# Altium PCB Elekid_MCU.PcbDoc
Units mm, origin at the board's own origin, x right, y up, seen from the top; angles counter-clockwise.
Board outline 56.92 x 36.36 mm, 2 copper layers (Top Layer, Bottom Layer); 29 components, 28 nets, 123 pads, 27 vias.
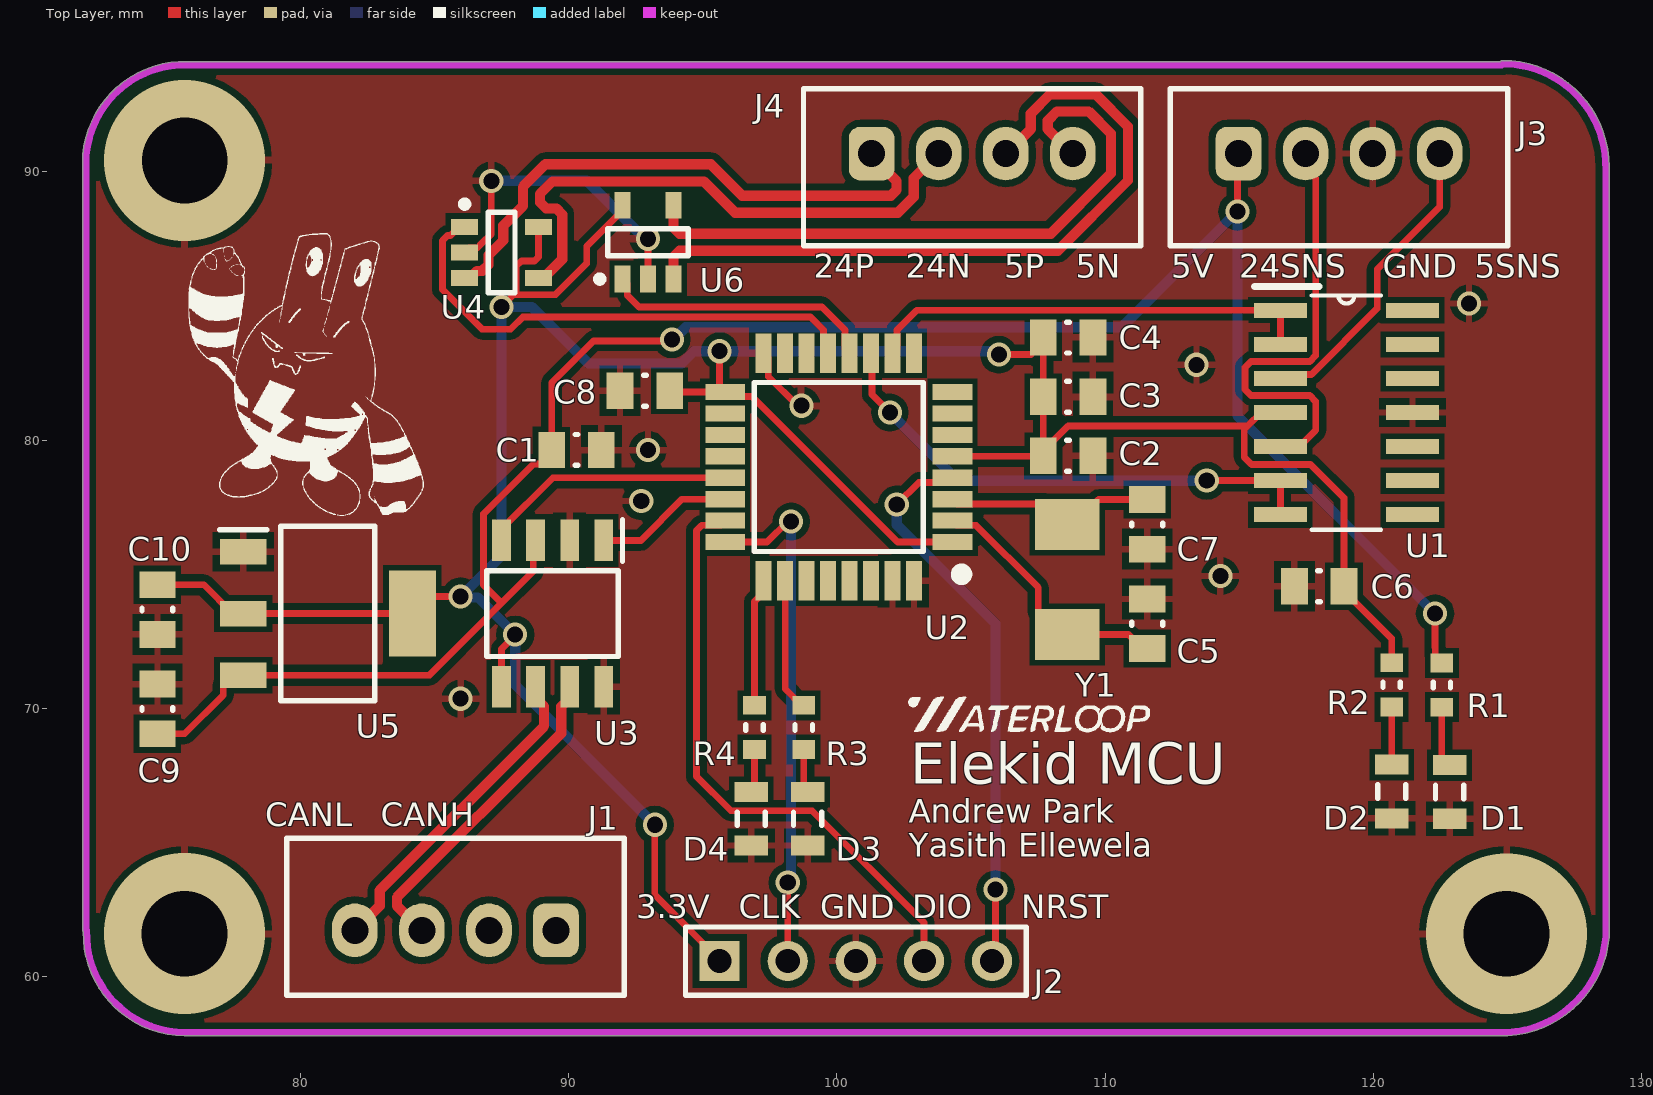
[diagram p0: Top Layer view]
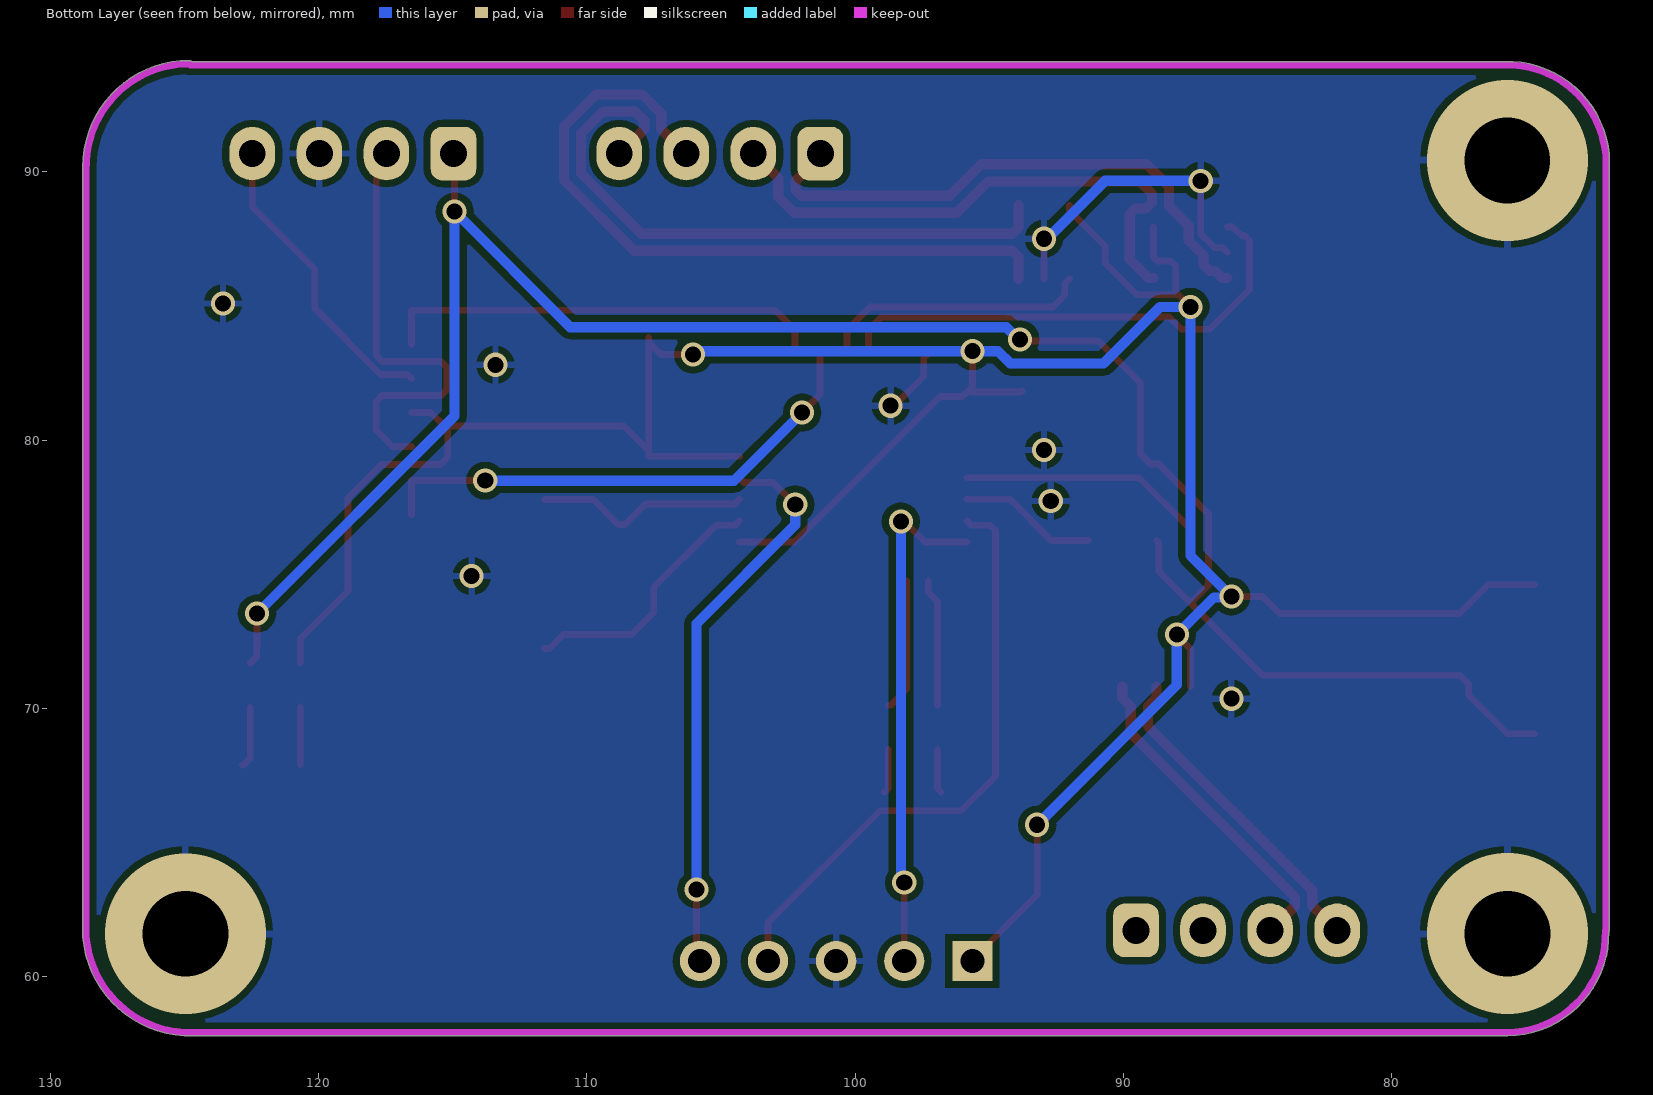
[diagram p1: Bottom Layer view, seen from below]
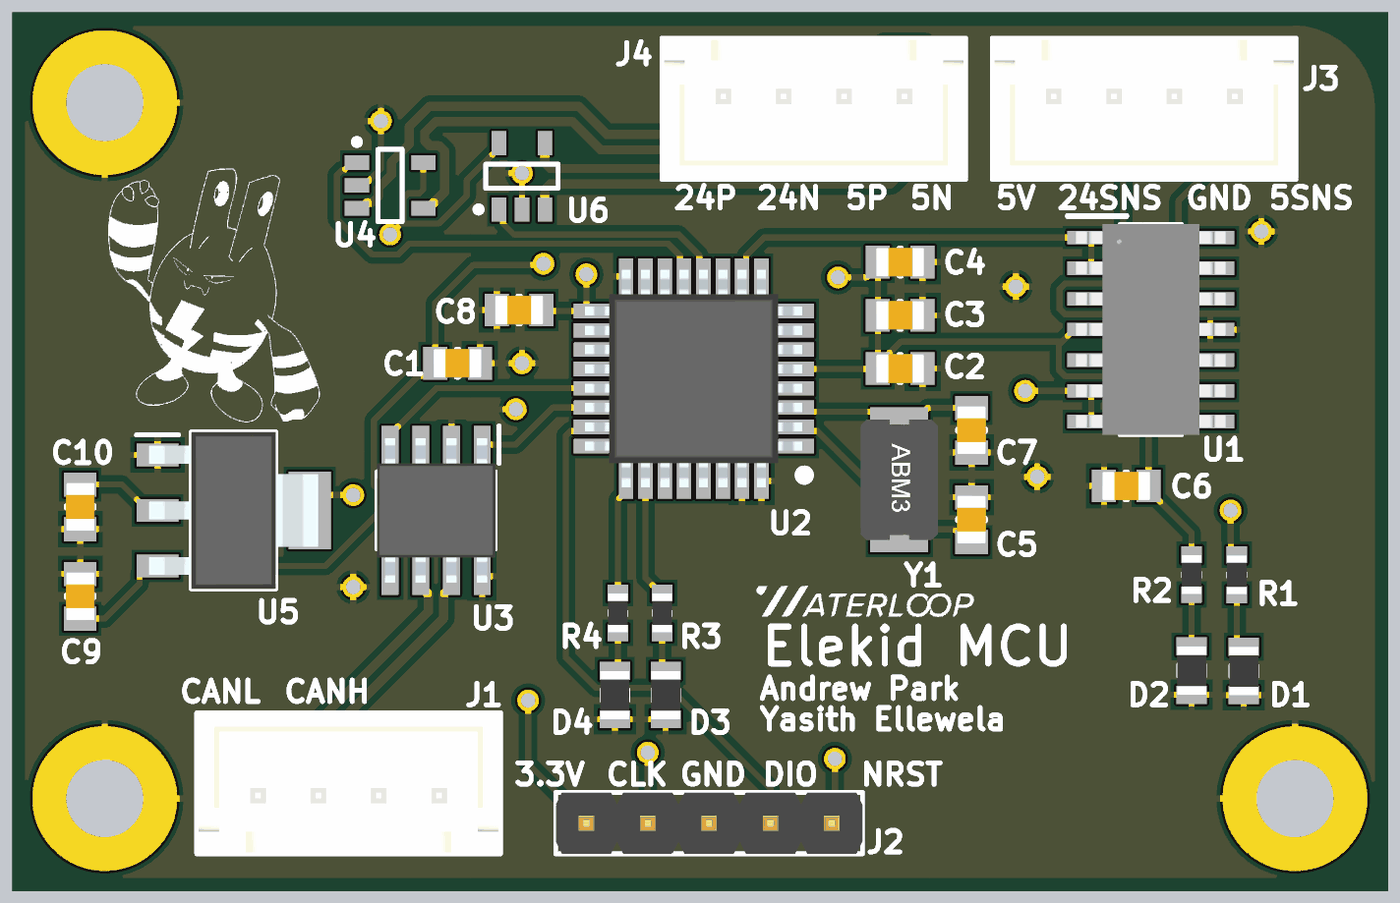
[diagram p2: 3D render of the assembled board from above, using the file's embedded part models]

## Layer stack, top to bottom
Top Solder: solder mask 0.0102, Solder Resist, Dk 3.5
Top Layer: signal copper 0.0356
Dielectric 1: dielectric 0.32, FR-4, Dk 4.8
Bottom Layer: signal copper 0.0356
Bottom Solder: solder mask 0.0102, Solder Resist, Dk 3.5

## Board outline
71.914,61.676 ccw(c75.72,61.6) 75.674,57.793 ccw(c75.72,57.912) 75.72,57.785 124.654,57.785 ccw(c124.654,57.912) 124.674,57.786 ccw(c124.788,61.801) 128.804,61.801 ccw(c128.677,61.801) 128.792,61.855 128.792,90.185 ccw(c124.83,90.185) 124.83,94.147 ccw(c124.83,94.019) 124.738,94.107 75.82,94.107 ccw(c75.691,90.303) 71.884,90.303 71.884,61.758 ccw(c72.011,61.758)

## Design rules (kind name [scope] priority, off if disabled: settings)
Clearance [All] p1: gap=0.254 ignorepadtopadclearanceinfootprint=FALSE except(0: Arc-Hole Track-Hole SMDPad-Hole THPad-Hole Via-Hole Fill-Hole Poly-Hole Region-Hole Text-Hole; 0.127: Arc-Arc Arc-Track Track-Track SMDPad-SMDPad; 0.2: Arc-SMDPad Track-SMDPad SMDPad-Fill SMDPad-Poly SMDPad-Region)
DiffPairsRouting [All] p1: maxlimit=0.254 minlimit=0.254 mostfreqgap=0.254 toplayer_minwidth=0.381 toplayer_maxwidth=0.381 toplayer_prefwidth=0.381 bottomlayer_minwidth=0.381 bottomlayer_maxwidth=0.381 bottomlayer_prefwidth=0.381 maxuncoupledlength=12.7
PolygonConnect [All] p1: connectstyle=Relief reliefconductorwidth=0.254 reliefentries=4 polygonreliefangle="90 Angle" airgapwidth=0.254
RoutingVias [All] p1: holewidth=0.5 width=1 viastyle="Through Hole" minholewidth=0.2 minwidth=0.6 maxholewidth=0.711 maxwidth=1.27
SilkToSolderMaskClearance [IsPad] p1: minsilkscreentomaskgap=0.15 clearancetoexposedcopper=TRUE
SolderMaskExpansion [All] p1: expansion=0.102 istentingtop=FALSE
Width [All] p1: maxlimit=0.381 minlimit=0.254 preferedwidth=0.381 toplayer_prefwidth=0.254 minimp=50.000000 maximp=50.000000 favimp=50.000000
28 further rules are at their usual default settings.

## Classes and differential pairs
differential pair CAN: +CAN_P -CAN_N
differential pair 24V: +24V_P -24V_N
differential pair 5V: +5V_P -5V_N

## Components (designator, comment, footprint, x,y, rotation, side; value= is the part's Value field where it differs from the comment)
C1 "Capacitor - Nonpolarized" "0805 - Capacitor" 92.847,81.833 r0 top value=100nF
C2 "Capacitor - Nonpolarized" "0805 - Capacitor" 108.621,79.411 r180 top value=100nF
C3 "Capacitor - Nonpolarized" "0805 - Capacitor" 108.621,81.616 r180 top value=10nF
C4 "Capacitor - Nonpolarized" "0805 - Capacitor" 108.621,83.82 r180 top value=1uF
C5 "Capacitor - Nonpolarized" "0805 - Capacitor" 111.575,73.152 r270 top value=28pF
C6 "Capacitor - Nonpolarized" "0805 - Capacitor" 117.983,74.549 r0 top value=100nF
C7 "Capacitor - Nonpolarized" "0805 - Capacitor" 111.575,76.856 r90 top value=28pF
C8 "Capacitor - Nonpolarized" "0805 - Capacitor" 90.297,79.629 r180 top value=100nF
C9 "Capacitor - Nonpolarized" "0805 - Capacitor" 74.676,69.977 r270 top value=10uF
C10 "Capacitor - Nonpolarized" "0805 - Capacitor" 74.676,73.681 r90 top value=10uF
D1 "LED" "0805 - Resistor" 122.845,66.882 r270 top
D2 "LED" "0805 - Resistor" 120.686,66.898 r270 top
D3 "LED" "0805 - Resistor" 98.914,65.882 r270 top
D4 "LED" "0805 - Resistor" 96.81,65.882 r270 top
J1 "1x4 Header" B4B-XH 89.535,61.722 r180 top
J2 "1x5 Header" HDR1X5 95.631,60.579 r0 top
J3 "1x4 Header" B4B-XH 114.975,90.678 r0 top
J4 "1x4 Header" B4B-XH 101.299,90.678 r0 top
R1 "Resistor" "0603 - Resistor" 122.555,70.866 r270 top value=330
R2 "Resistor" "0603 - Resistor" 120.686,70.873 r270 top value=330
R3 "Resistor" "0603 - Resistor" 98.768,69.286 r270 top value=330
R4 "Resistor" "0603 - Resistor" 96.937,69.286 r270 top value=330
U1 "LM324AMX/NOPB" LM324AMX/NOPB 118.999,81.026 r0 top
U2 "STM32F303K6T6" QFP80P900X900X160-32N 100.076,78.994 r180 top
U3 "TJA1051T_3,118" TJA1051T/3,118 89.408,73.533 r270 top
U4 "INA180" INA180 87.503,86.995 r0 top
U5 "TLV1117-33IDCYR" TLV1117 81.026,73.533 r0 top
U6 "INA180" INA180 92.964,87.376 r90 top
Y1 "Oscillator" "2-SMD NO LEAD CRSYSTAL" 108.585,74.803 r270 top

## Footprints (in the part's own frame and the unit in brackets; to place one, negate y for a bottom-side part, rotate by r counter-clockwise, add the part's x,y. Pads: shape width x height; smd on the part's side, far side on the other; paste and mask are expansions set on the pad)
"2-SMD NO LEAD CRSYSTAL" [mm]
  rect 1.9x2.4 smd: 1(-2.05,0) 2(2.05,0)
  body extent -2.5,-1.6 2.5,1.6, height 1.3
"0603 - Resistor" [mm] "0603 Chip Resistor - IPC Medium Density"
  rect 0.7x0.85 smd: 1(-0.825,0) 2(0.825,0)
  silkscreen extent -0.1,-0.33 0.1,0.33, body extent -0.8,-0.4 0.8,0.4, height 0.45
"0805 - Capacitor" [mm] "0805 Chip Capacitor - IPC Medium Density"
  rect 1x1.35 smd: 1(-0.925,0) 2(0.925,0)
  silkscreen extent -0.05,-0.58 0.05,0.58, body extent -1,-0.6 1,0.6, height 1.2
"0805 - Resistor" [mm] "0805 Chip Resistor - IPC Medium Density"
  rect 0.75x1.25 smd: 1(-1,0) 2(1,0)
  silkscreen extent -0.25,-0.53 0.25,0.53, body extent -1,-0.6 1,0.6, height 0.5
B4B-XH [mm] "JST 4-Pin"
  rrect50% 1.7x2 hole 1: 1(0,0)
  oval 1.7x2 hole 1: 2(2.5,0) 3(5,0) 4(7.5,0)
  silkscreen extent -2.54,-3.43 10.03,2.41, body extent -2.45,-3.4 9.95,2.35, height 7
HDR1X5 [mm] "Connector; Header; 5 Position"
  rect 1.5x1.5 hole 0.9: 1(0,0)
  round 1.5 hole 0.9: 2(2.54,0) 3(5.08,0) 4(7.62,0) 5(10.16,0)
  silkscreen extent -1.27,-1.27 11.43,1.27, body extent -1.27,-1.27 11.43,1.27, height 8.54
INA180 [mm] "SOT23, 5-Leads, Body 2.80x2.80mm, Pitch 0.95mm, IPC Medium Density"
  rect 1x0.6 smd: 1(-1.375,0.95) 2(-1.375,0) 3(-1.375,-0.95) 4(1.375,-0.95) 5(1.375,0.95)
  silkscreen extent -1.5,-1.5 0.5,1.92, body extent -0.88,-1.5 0.87,1.5, height 1.1
LM324AMX/NOPB [mil] "Gen Purp 4Ch Opamp"
  rect 78x22 smd: 1(-97,150) 2(-97,100) 3(-97,50) 4(-97,0) 5(-97,-50) 6(-97,-100) 7(-97,-150) 8(97,-150) 9(97,-100) 10(97,-50) 11(97,0) 12(97,50) 13(97,100) 14(97,150)
  silkscreen extent -135,-172 51,185, body extent -122,-172 122,172, height 69
QFP80P900X900X160-32N [mm]
  rect 1.475x0.6 smd: 1(-4.238,2.8) 2(-4.238,2) 3(-4.238,1.2) 4(-4.238,0.4) 5(-4.238,-0.4) 6(-4.238,-1.2) 7(-4.238,-2) 8(-4.238,-2.8) 17(4.238,-2.8) 18(4.238,-2) 19(4.238,-1.2) 20(4.238,-0.4) 21(4.238,0.4) 22(4.238,1.2) 23(4.238,2) 24(4.238,2.8)
  rect 0.6x1.475 smd: 9(-2.8,-4.238) 10(-2,-4.238) 11(-1.2,-4.238) 12(-0.4,-4.238) 13(0.4,-4.238) 14(1.2,-4.238) 15(2,-4.238) 16(2.8,-4.238) 25(2.8,4.238) 26(2,4.238) 27(1.2,4.238) 28(0.4,4.238) 29(-0.4,4.238) 30(-1.2,4.238) 31(-2,4.238) 32(-2.8,4.238)
  silkscreen extent -4.77,-3.15 3.15,4.2, body extent -4.5,-4.5 4.5,4.5, height 1.6
TJA1051T/3,118 [mm] "SOIC127P600X175-8N"
  rect 1.55x0.7 smd: 1(-2.725,1.905) 2(-2.725,0.635) 3(-2.725,-0.635) 4(-2.725,-1.905) 5(2.725,-1.905) 6(2.725,-0.635) 7(2.725,0.635) 8(2.725,1.905)
  silkscreen extent -3.5,-2.45 1.6,2.61, body extent -3,-2.45 3,2.45, height 1.75
TLV1117 [mm] "SOT230P700X180-4N"
  rect 1.75x0.95 smd: 1(-3.15,2.3) 2(-3.15,0) 3(-3.15,-2.3)
  rect 1.75x3.2 smd: 2(3.15,0)
  silkscreen extent -4.03,-3.25 1.75,3.25, body extent -3.5,-3.25 3.5,3.25, height 1.8

## Part data
C1 C2 C6 C8: "Nonpolarized Capacitor", Supplier Part Number=311-1140-1-ND
C3: "Nonpolarized Capacitor", Supplier Part Number=311-1136-1-ND
C4: "Nonpolarized Capacitor", Supplier Part Number=311-1886-1-ND
C5 C7: "Nonpolarized Capacitor", Supplier Part Number=1276-2622-1-ND
C9 C10: "Nonpolarized Capacitor", Supplier Part Number=490-14381-1-ND
D1 D2: "Light Emitting Diode", Supplier Part Number=732-4986-1-ND
D3: "Light Emitting Diode", Supplier Part Number=732-4987-1-ND
D4: "Light Emitting Diode", Supplier Part Number=732-4984-1-ND
J1 J3 J4: "1x4 Pin Header"
J2: "1x5 Pin Header"
R1 R2 R3 R4: Supplier Part Number=311-330HRCT-ND
U1: "Gen Purp 4Ch Opamp"
U2: "Integrated Circuit"
U3: "CAN Transceiver IC 4.5V-5.5V 250ns", Manufacturer=NXP, Manufacturer Part Number=TJA1051T/3,118, Supplier Part Number=568-8684-1-ND, Datasheet=http://www.nxp.com/docs/en/data-sheet/TJA1051.pdf, Supplier=Digikey
U4 U6: "0V to 26V Current Sense Amplifier", Manufacturer="Texas Instruments", Manufacturer Part Number=INA180A2IDBVR, Supplier Part Number=296-47653-1-ND, Datasheet=https://www.ti.com/lit/ds/symlink/ina180.pdf, Supplier=Digikey
U5: "Linear Voltage Regulator IC 3.3V 800MA SOT223-4", Manufacturer="Texas Instruments", Supplier Part Number=296-21112-1-ND, Datasheet=http://www.ti.com/lit/ds/symlink/tlv1117.pdf?HQS=TI-null-null-digikeymode-df-pf-null-wwe&ts=1590668900314, Manufacturer Part Number=TLV1117-33IDCYR, Supplier=Digikey
Y1: "Crystal Oscillator", Supplier Part Number=478-6970-1-ND

## Via types
v1: diameter 0.9, hole 0.6, Top Layer to Bottom Layer, 24 vias
v2: diameter 6, hole 3.2, Top Layer to Bottom Layer, 3 vias

## Nets (pads, with @x,y where several pads share a name; then routed paths per layer and width w, separated by ;. In a path a pad name is that pad's centre, name@x,y a point inside that pad or via, vN(x,y) a via of type N, cw(c..) or ccw(c..) an arc to the next point about the centre after c; other vN are vias at no path point)
"5V VSENSE": J3.4 U1.3 | length 11.4
  Top Layer w0.254: U1.3 116.688,82.448 117.689,82.448 120.145,84.905 120.145,86.363 122.475,88.692 J3.4
5V_N: J4.4 U6.4 | length 24.1
  Top Layer w0.381: U6.4 93.914,87.917 94.137,87.693 107.975,87.693 110.221,89.939 110.221,91.417 109.388,92.25 108.21,92.25 107.867,91.906 107.867,91.59 108.779,90.678 J4.4
5V_P: J4.3 U6.3 | length 27.3
  Top Layer w0.381: U6.3 93.914,86.835 94.137,87.058 108.238,87.058 110.856,89.676 110.856,91.68 109.651,92.885 107.947,92.885 107.232,92.169 107.232,91.59 106.319,90.678 J4.3
"24V VSENSE": J3.2 U1.5 | length 16.8
  Top Layer w0.254: U1.5 117.246,79.756 117.853,80.362 117.853,81.441 117.633,81.661 115.438,81.661 115.218,81.881 115.218,82.711 115.438,82.931 117.633,82.931 117.853,83.151 117.853,89.759 117.475,90.137 J3.2
24V_N: J4.2 U4.4 | length 21.2
  Top Layer w0.381: U4.4 89.078,86.045 89.768,86.736 89.768,88.407 89.54,88.635 89.159,88.635 88.936,88.859 88.936,89.174 89.403,89.641 95.044,89.641 96.214,88.471 102.271,88.471 102.866,89.067 102.866,89.766 103.592,90.491 103.592,90.678 J4.2
24V_P: J4.1 U4.3 | length 21.1
  Top Layer w0.381: U4.3 86.328,86.045 86.588,86.305 86.79,86.305 87.019,86.533 87.019,86.892 87.566,87.439 87.566,87.986 88.301,88.72 88.301,89.437 89.14,90.276 95.307,90.276 96.477,89.106 102.008,89.106 102.231,89.33 102.231,89.645 101.299,90.578 J4.1
+3.3V: C1.2 C2.2 C3.2 C4.2 C6.2 C10.2 J2.1 R2.1 U1.4 U2.1 U2.5 U2.17 U3.5 U4.5 U5.2 U6.5 | length 118.9
  Top Layer w0.254: C10.2 76.403,74.606 77.476,73.533 77.876,73.533 84.176,73.533 84.811,74.168 v1(85.979,74.168) ; U3.5 87.503,72.206 88.011,72.714 v1(88.011,72.749) ; v1(87.503,84.963) 87.958,85.418 ; U4.5 88.878,86.821 88.729,86.672 88.243,86.672 88.051,86.48 88.051,85.511 87.958,85.418 ; U6.5 92.014,88.551 90.677,87.214 90.677,86.582 89.513,85.418 87.958,85.418 ; v1(93.218,65.659) 93.218,63.042 95.656,60.604 J2.1 ; C1.2 93.811,81.794 95.678,81.794 U2.17@95.758,81.874 ; v1(95.631,83.312) 95.631,82.001 U2.17@95.758,81.874 ; U2.1 102.272,76.194 96.845,81.621 96.011,81.621 U2.17 U2.17@95.758,81.874 ; U2.5 107.679,79.394 C2.2 C2.2@107.696,79.586 ; v1(106.045,83.185) 107.236,83.185 C4.2@107.696,83.645 ; C4.2 C4.2@107.696,83.645 ; U1.4 115.824,81.026 115.316,80.518 ; R2.1 120.686,72.596 118.908,74.374 C6.2 118.908,77.846 117.661,79.092 115.466,79.092 115.189,79.37 115.189,80.391 115.316,80.518 ; C2.2@107.696,79.586 108.628,80.518 115.316,80.518 ; C2.2@107.696,79.586 C3.2 C4.2@107.696,83.645
  Bottom Layer w0.381: v1(93.218,65.659) 88.011,70.866 v1(88.011,72.749) 86.627,74.133 86.014,74.133 v1(85.979,74.168) 87.503,75.692 v1(87.503,84.963) 88.635,84.963 90.741,82.856 94.224,82.856 94.679,83.312 v1(95.631,83.312) 105.918,83.312 v1(106.045,83.185)
+5V: C8.2 C9.2 J3.1 R1.1 U3.3 U5.3 | length 78.1
  Top Layer w0.254: C9.2 75.695,69.052 77.128,70.485 77.128,70.885 77.476,71.233 U5.3 84.813,71.233 87.499,73.918 ; U3.3 88.682,76.167 88.682,75.102 87.499,73.918 ; v1(93.853,83.751) 93.795,83.693 90.932,83.693 89.372,82.133 89.372,79.804 C8.2 89.372,79.482 88.999,79.109 88.686,79.109 86.826,77.249 86.826,74.591 87.499,73.918 ; v1(114.935,88.519) 114.935,90.638 J3.1 ; v1(122.301,73.533) 122.301,72.263 122.311,72.253 122.311,71.914 122.534,71.691 R1.1
  Bottom Layer w0.381: v1(93.853,83.751) 93.911,83.751 94.367,84.207 110.623,84.207 v1(114.935,88.519) 114.935,80.899 v1(122.301,73.533)
ADC_5V_I: U2.12 U6.1 | length 10.3
  Top Layer w0.254: U6.1 92.187,85.828 92.187,85.403 92.627,84.963 99.445,84.963 100.303,84.105 100.303,83.405 U2.12
ADC_5V_V: U1.1 U1.2 U2.10 | length 16.8
  Top Layer w0.254: U2.10 102.249,83.405 102.249,84.105 102.98,84.836 U1.1 U1.2
ADC_24V_I: U2.13 U4.1 | length 19
  Top Layer w0.254: U4.1 85.928,87.945 85.605,87.622 85.493,87.622 85.301,87.43 85.301,85.61 86.779,84.132 87.847,84.132 88.297,84.582 99.026,84.582 99.503,84.105 99.503,83.878 99.503,83.405 U2.13
ADC_24V_V: U1.6 U1.7 U2.11 | length 19.4
  Top Layer w0.254: U2.11 101.311,83.197 101.311,81.696 v1(101.981,81.026) ; v1(113.792,78.486) U1.6 U1.7
  Bottom Layer w0.381: v1(101.981,81.026) 104.521,78.486 v1(113.792,78.486)
CAN_N: J1.4 U3.6 | length 12.2
  Top Layer w0.381: J1.4 82.055,61.722 82.967,62.634 82.967,63.213 89.09,69.336 89.09,70.066 88.773,70.383 U3.6
CAN_P: J1.3 U3.7 | length 12.2
  Top Layer w0.381: J1.3 84.515,61.722 83.602,62.634 83.602,62.95 89.725,69.073 89.725,70.066 90.043,70.383 U3.7
CANRX: U2.21 U3.4 | length 9.6
  Top Layer w0.254: U3.4 87.503,76.683 89.414,78.594 U2.21
CANTX: U2.22 U3.1 | length 5.2
  Top Layer w0.254: U3.1 92.7,76.258 94.236,77.794 U2.22
GND: C1.1 C2.1 C3.1 C4.1 C5.1 C6.1 C7.1 C8.1 C9.1 C10.1 D1.2 D2.2 D3.2 D4.2 J2.3 J3.3 U1.11 U2.16 U2.31 U2.32 U3.2 U3.8 U4.2 U5.1 U6.2 | length 14.2
  Top Layer w0.254: U4.2 86.301,87.168 86.613,87.168 86.763,87.318 87.122,87.677 v1(87.122,89.662) ; U6.2 v1(92.964,87.503) ; U2.16 97.449,83.059 97.449,82.359 98.528,81.28 v1(98.679,81.28)
  Bottom Layer w0.381: v1@87.122,89.789 v1(87.122,89.662) 90.678,89.662 92.837,87.503 v1(92.964,87.503)
  other v1: 85.979,70.358 114.3,74.93 92.71,77.724 92.964,79.629 113.411,82.804 123.571,85.09
  other v2: 75.69,61.597 124.968,61.595 75.692,90.424
NetC5_2: C5.2 U2.2 Y1.2 | length 9.8
  Top Layer w0.254: U2.2 104.487,76.821 105.187,76.821 107.512,74.496 107.512,73.576 108.335,72.753 Y1.2 110.874,72.753 111.4,72.227 C5.2
NetC7_2: C7.2 U2.3 Y1.1 | length 8
  Top Layer w0.254: U2.3 104.487,77.621 107.817,77.621 Y1.1 108.835,76.853 109.763,77.781 C7.2
NetD1_1: D1.1 R1.2 | length 2.3
  Top Layer w0.254: R1.2 122.555,68.13 122.803,67.882 D1.1
NetD2_1: D2.1 R2.2 | length 2.2
  Top Layer w0.254: D2.1 R2.2
NetD3_1: D3.1 R3.2 | length 1.6
  Top Layer w0.254: R3.2 98.768,67.028 D3.1
NetD4_1: D4.1 R4.2 | length 1.6
  Top Layer w0.254: D4.1 96.937,67.009 R4.2
NetR3_1: R3.1 U2.26 | length 5
  Top Layer w0.254: U2.26 98.076,70.729 98.693,70.111 R3.1
NetR4_1: R4.1 U2.25 | length 4.8
  Top Layer w0.254: R4.1 96.937,73.979 97.276,74.318 U2.25
NRESET: J2.5 U2.4 | length 21.1
  Top Layer w0.254: v1(102.235,77.597) 103.059,78.421 104.141,78.421 U2.4 ; J2.5 105.918,60.706 v1(105.918,63.246)
  Bottom Layer w0.381: v1(102.235,77.597) 102.235,76.835 105.918,73.152 v1(105.918,63.246)
SWCLK: J2.2 U2.24 | length 19.3
  Top Layer w0.254: U2.24 97.405,76.194 98.173,76.962 v1(98.298,76.962) ; J2.2 98.044,60.706 98.171,60.833 v1(98.171,63.5)
  Bottom Layer w0.381: v1(98.171,63.5) 98.298,63.627 v1(98.298,76.962)
SWDIO: J2.4 U2.23 | length 22.6
  Top Layer w0.254: U2.23 95.665,76.821 94.965,76.821 94.773,76.629 94.773,67.456 96.05,66.18 99.079,66.18 103.251,62.008 J2.4
pads on no net: J1.1 J1.2 U1.8 U1.9 U1.10 U1.12 U1.13 U1.14 U2.6 U2.7 U2.8 U2.9 U2.14 U2.15 U2.18 U2.19 U2.20 U2.27 U2.28 U2.29 U2.30

## Polygon pours and split planes (outlines as drawn)
GND on Bottom Layer "GND_L02_P002" (solid, pour order 2): 72.009,93.98 128.651,93.98 128.651,57.912 72.009,57.912
GND on Top Layer "GND_L01_P003" (solid, pour order 3): 72.009,93.98 128.651,93.98 128.651,57.912 72.009,57.912

## Keep-outs
Keep-Out Layer:
  lines w0.254: 72.011,61.758 72.011,90.303 cw(c75.691,90.303) 75.818,93.98 124.791,93.98 ; 72.043,61.727 ccw(c75.72,61.6) 75.72,57.92 ; 75.72,57.912 124.654,57.912 ; 124.654,57.914 ccw(c124.788,61.801) 128.677,61.801 ; 124.83,94.019 cw(c124.83,90.185) 128.662,90.053 ; 128.664,61.782 128.664,90.185

## Silkscreen, mask and mechanical layers (free items; w line width, h text height)
Top Overlay:
  drawing of 20 lines, arcs and shapes, not listed
  text "24P" at 99.136,86.055 h0.89
  text "24N" at 102.565,86.055 h0.89
  text "5P" at 106.248,86.055 h0.89
  text "5N" at 108.915,86.055 h0.89
  text "5V" at 112.471,86.055 h0.89
  text "24SNS" at 115.011,86.055 h0.89
  text "GND" at 120.345,86.055 h0.89
  text "5SNS" at 123.774,86.055 h0.89
  text "Elekid MCU" at 102.743,67.183 h1.52
  text "Andrew Park" at 102.692,65.735 h0.89
  text "CANL" at 78.689,65.608 h0.89
  text "CANH" at 83.007,65.608 h0.89
  text "Yasith Ellewela" at 102.692,64.465 h0.89
  text "3.3V" at 92.532,62.179 h0.89
  text "CLK" at 96.342,62.179 h0.89
  text "GND" at 99.39,62.179 h0.89
  text "DIO" at 102.819,62.179 h0.89
  text "NRST" at 106.883,62.179 h0.89